# Altium PCB PDM-C_Rev3.PcbDoc
Units mil, origin at the board's own origin, x right, y up, seen from the top; angles counter-clockwise.
Board outline 5000 x 4200 mil, 2 copper layers (Top Layer, Bottom Layer); 84 components, 59 nets, 282 pads, 112 vias.
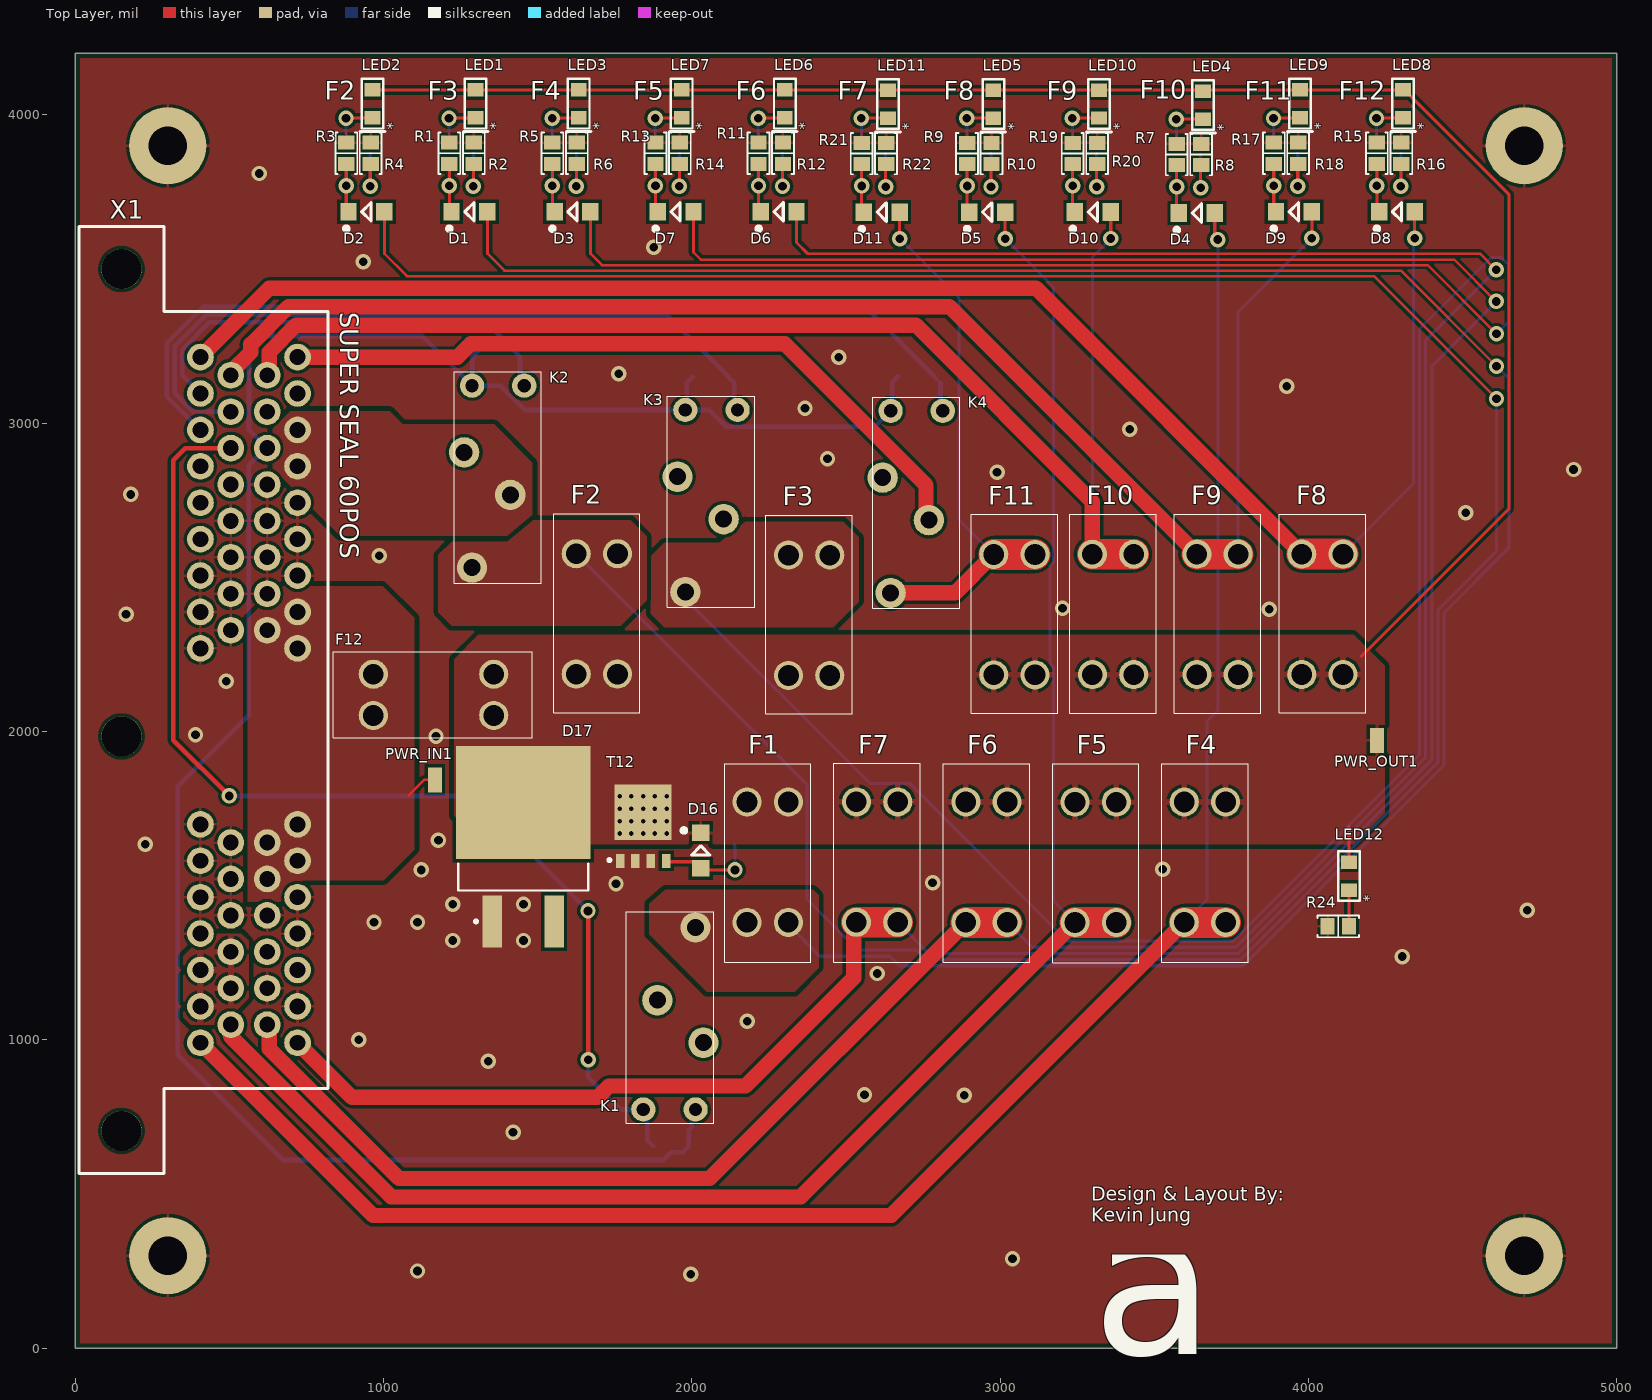
[diagram p0: Top Layer view]
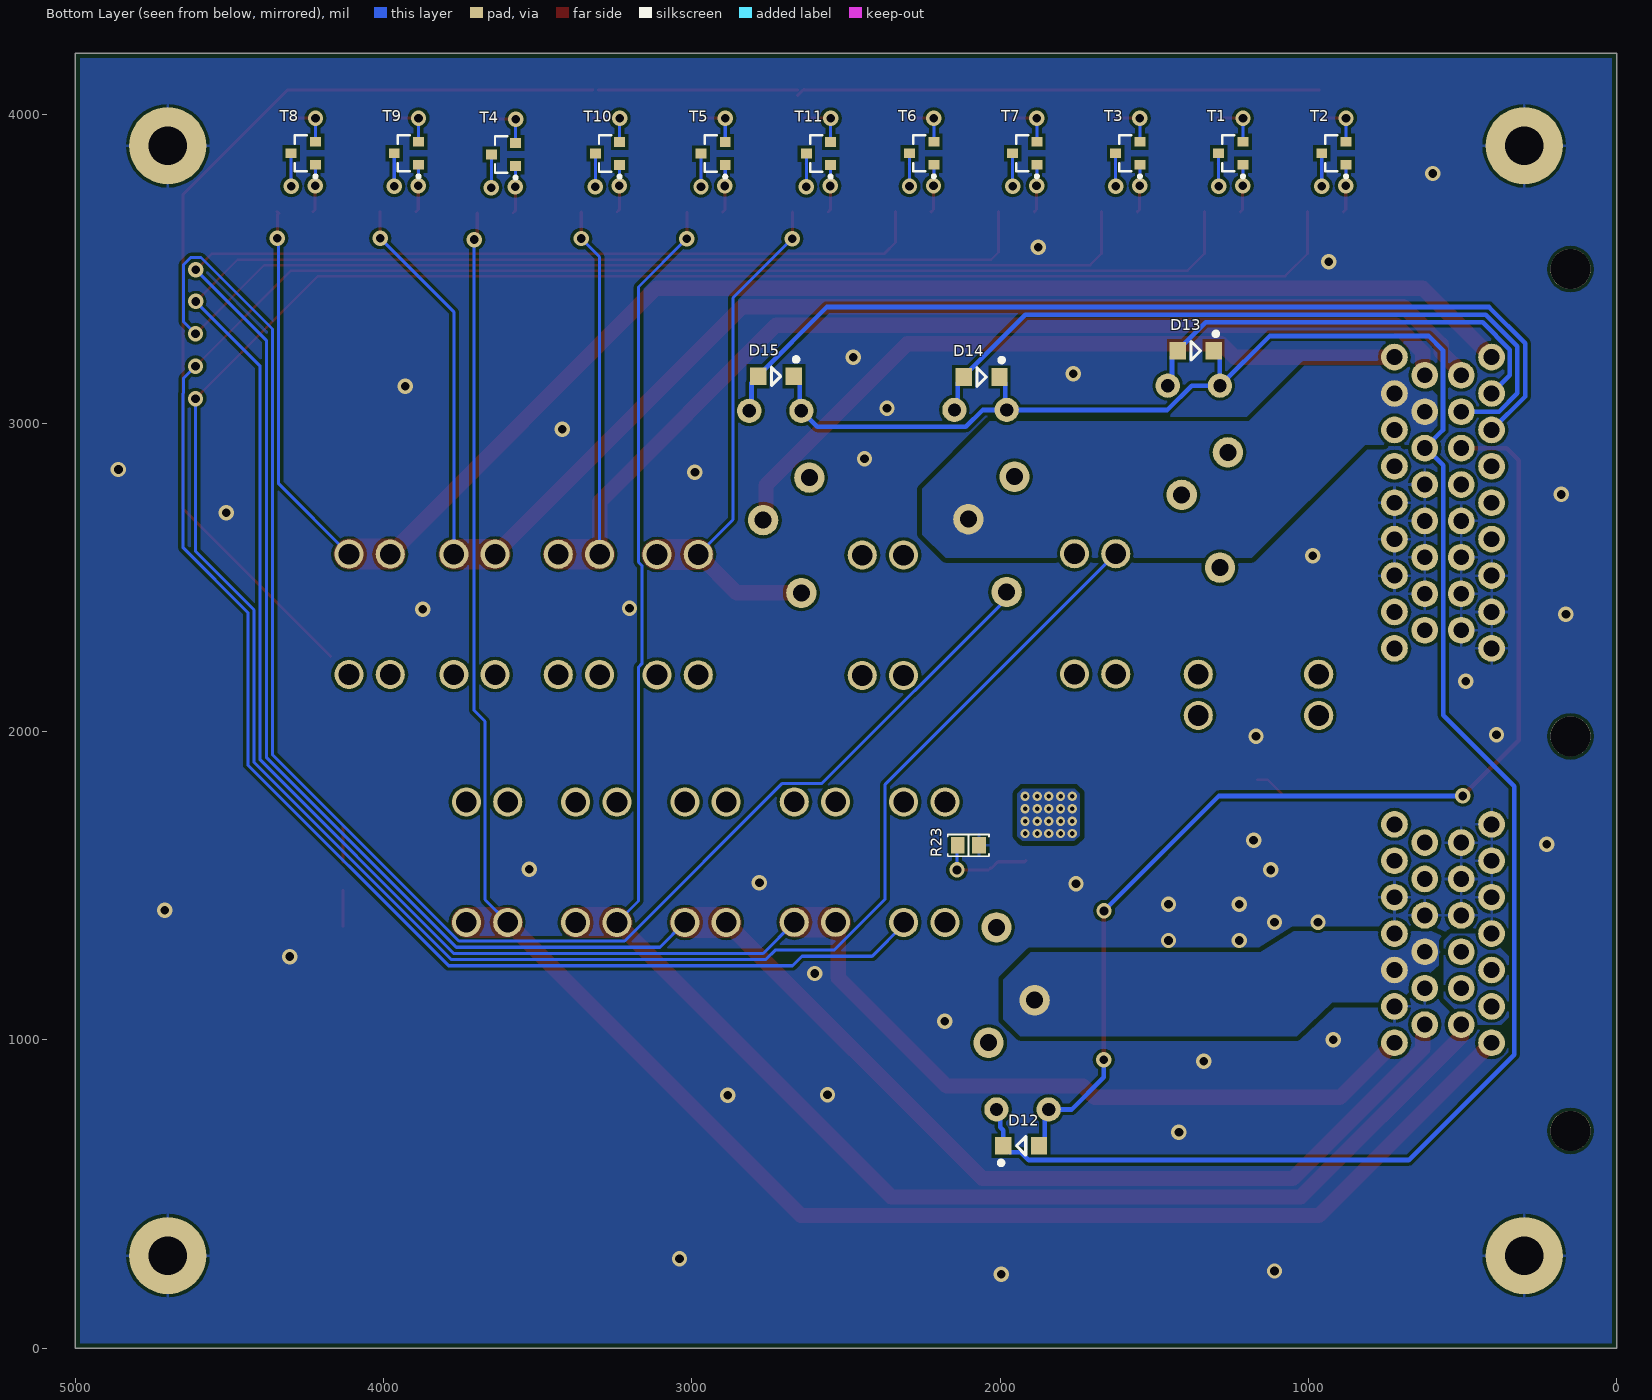
[diagram p1: Bottom Layer view, seen from below]
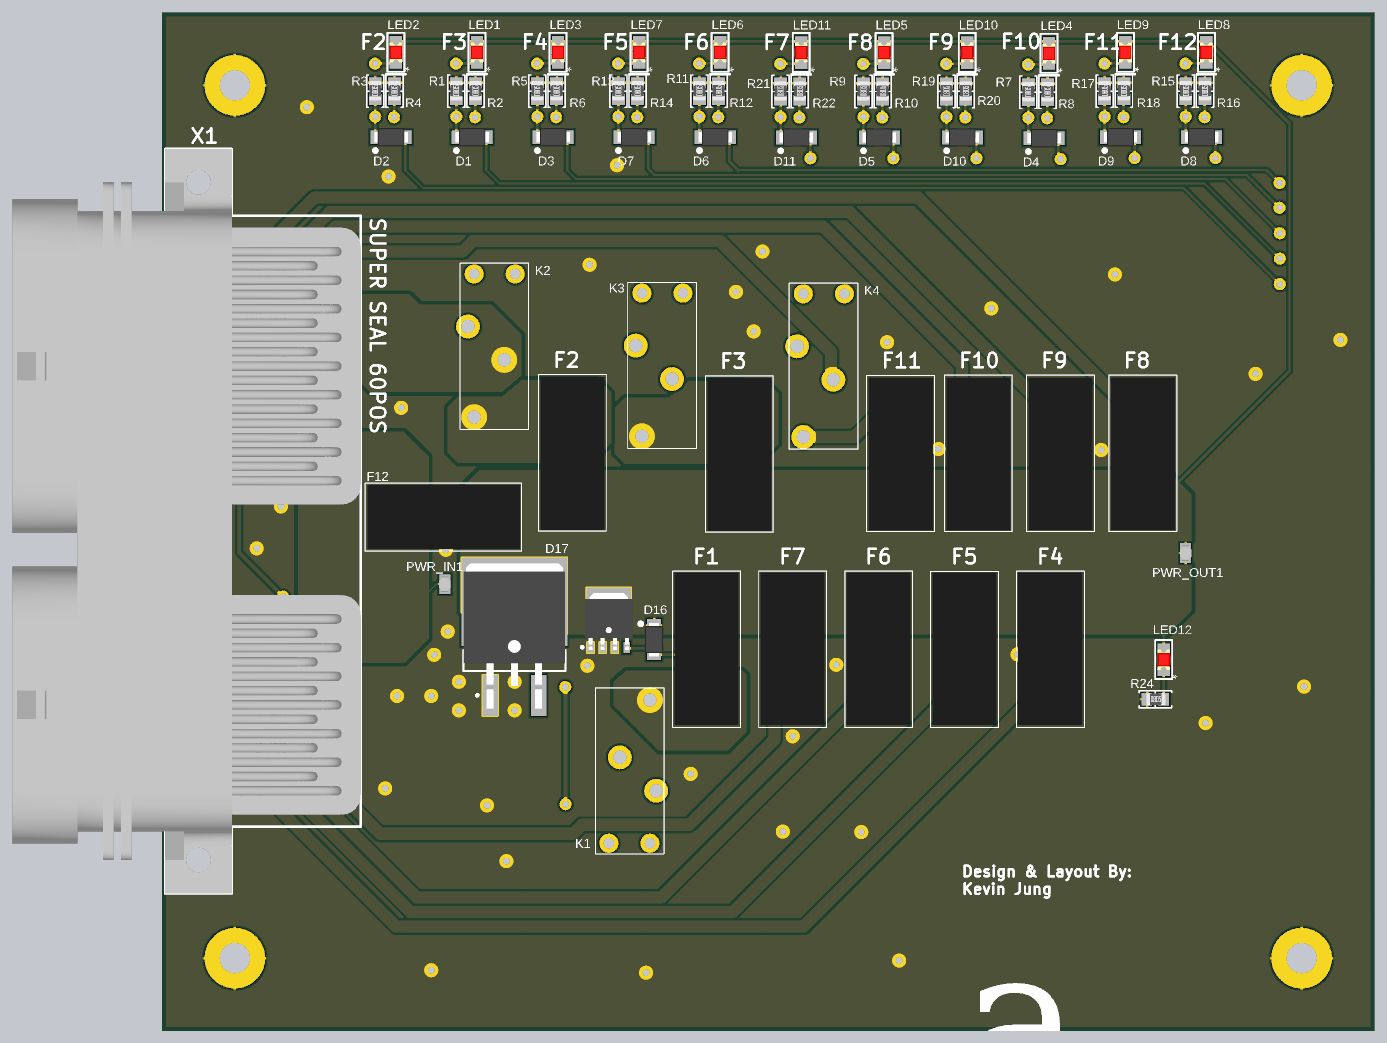
[diagram p2: 3D render of the assembled board from above, using the file's embedded part models]

## Layer stack, top to bottom
Top Solder: solder mask 0.4, Solder Resist, Dk 3.5
Top Layer: signal copper 1.4
Dielectric 1: dielectric 12.6, FR-4, Dk 4.8
Bottom Layer: signal copper 1.4
Bottom Solder: solder mask 0.4, Solder Resist, Dk 3.5

## Board outline
0,0 5000,0 5000,4200 0,4200

## Design rules (kind name [scope] priority, off if disabled: settings)
BoardOutlineClearance [All] p1: gap=15 ignorepadtopadclearanceinfootprint=FALSE
Clearance [All] p1: gap=10 ignorepadtopadclearanceinfootprint=FALSE except(0: Arc-Hole Track-Hole SMDPad-Hole THPad-Hole Via-Hole Fill-Hole Poly-Hole Region-Hole Text-Hole; 8: Track-THPad; 15: Poly-Poly)
Height [All] p1: minheight=0 maxheight=10000 prefheight=500
HoleSize [All] p1: absolutevalues=TRUE maxlimit=150 minlimit=10 maxpercent=80.000 minpercent=20.000
MinimumAnnularRing [All] p1: minimumring=7.5
MinimumSolderMaskSliver [All] p1: minsoldermaskwidth=8
PolygonConnect [All] p1: thpad.connectstyle=Relief thpad.reliefconductorwidth=10 thpad.reliefentries=4 thpad.polygonreliefangle="90 Angle" thpad.airgapwidth=10 smdpad.connectstyle=Relief smdpad.reliefconductorwidth=10 smdpad.reliefentries=4 smdpad.polygonreliefangle="90 Angle" smdpad.airgapwidth=10 via.connectstyle=Direct via.reliefconductorwidth=10 via.reliefentries=4 via.polygonreliefangle="90 Angle" via.airgapwidth=10
RoutingVias [All] p1: holewidth=28 width=50 viastyle="Through Hole" minholewidth=15 minwidth=30 maxholewidth=28 maxwidth=50
SolderMaskExpansion [All] p1: expansion=4
Width [All] p1: maxlimit=100 minlimit=8 preferedwidth=10 minimp=50.000000 maximp=50.000000 favimp=50.000000
27 further rules are at their usual default settings.

## Classes and differential pairs
channel class Relay: U_Relay1 U_Relay2 U_Relay3 U_Relay4
channel class Blown_Fuse_LED: U_Blown_Fuse_LED1 U_Blown_Fuse_LED2 U_Blown_Fuse_LED3 U_Blown_Fuse_LED4 U_Blown_Fuse_LED5 U_Blown_Fuse_LED6 U_Blown_Fuse_LED7 U_Blown_Fuse_LED8 U_Blown_Fuse_LED9 U_Blown_Fuse_LED10 U_Blown_Fuse_LED11
component class U_Superseal: X1
component class U_RVP_OVP_HC: D16 D17 LED12 PWR_IN1 PWR_OUT1 R23 R24 T12
component class U_Relay4: D15 J1_U_Relay4 J2_U_Relay4 J3_U_Relay4 J4_U_Relay4 K4 M1_U_Relay4
component class U_Relay3: D14 J1_U_Relay3 J2_U_Relay3 J3_U_Relay3 J4_U_Relay3 K3 M1_U_Relay3
component class U_Relay2: D13 J1_U_Relay2 J2_U_Relay2 J3_U_Relay2 J4_U_Relay2 K2 M1_U_Relay2
component class U_Relay1: D12 J1_U_Relay1 J2_U_Relay1 J3_U_Relay1 J4_U_Relay1 K1 M1_U_Relay1
component class U_Blown_Fuse_LED11: D11 F11 LED11 R21 R22 T11
component class U_Blown_Fuse_LED10: D10 F10 LED10 R19 R20 T10
component class U_Blown_Fuse_LED9: D9 F9 LED9 R17 R18 T9
component class U_Blown_Fuse_LED8: D8 F8 LED8 R15 R16 T8
component class U_Blown_Fuse_LED7: D7 F7 LED7 R13 R14 T7
component class U_Blown_Fuse_LED6: D6 F6 LED6 R11 R12 T6
component class U_Blown_Fuse_LED5: D5 F5 LED5 R9 R10 T5
component class U_Blown_Fuse_LED4: D4 F4 LED4 R7 R8 T4
component class U_Blown_Fuse_LED3: D3 F3 LED3 R5 R6 T3
component class U_Blown_Fuse_LED2: D2 F2 LED2 R3 R4 T2
component class U_Blown_Fuse_LED1: D1 F1 LED1 R1 R2 T1
component class PDM: F12

## Components (designator, comment, footprint, x,y, rotation, side; value= is the part's Value field where it differs from the comment)
D1 "1N5819" SOD123F 1278.58,3686 r180 top value=1A (schematic designator D2)
D2 "1N5819" SOD123F 944.29,3686 r180 top value=1A
D3 "1N5819" SOD123F 1612.87,3686 r180 top value=1A (schematic designator D2)
D4 "1N5819" SOD123F 3637.98,3681.83 r180 top value=1A (schematic designator D2)
D5 "1N5819" SOD123F 2957.98,3685 r180 top value=1A (schematic designator D2)
D6 "1N5819" SOD123F 2281.45,3686 r180 top value=1A (schematic designator D2)
D7 "1N5819" SOD123F 1947.16,3686 r180 top value=1A (schematic designator D2)
D8 "1N5819" SOD123F 4287.2,3686 r180 top value=1A (schematic designator D2)
D9 "1N5819" SOD123F 3952.91,3686 r180 top value=1A (schematic designator D2)
D10 "1N5819" SOD123F 3300.62,3685.17 r180 top value=1A (schematic designator D2)
D11 "1N5819" SOD123F 2615.98,3685 r180 top value=1A (schematic designator D2)
D12 "DIODE" SOD123F 1932,656 r0 bottom value=1A (schematic designator D1)
D13 "DIODE" SOD123F 1365.28,3235 r180 bottom value=1A (schematic designator D1)
D14 "DIODE" SOD123F 2060,3150 r180 bottom value=1A (schematic designator D1)
D15 "DIODE" SOD123F 2727,3152 r180 bottom value=1A (schematic designator D1)
D16 "DDZ9701-7" SOD123F 2029,1614 r90 top value=14Vz (schematic designator D3)
D17 "FFSB3065B-F085" FFSB3065B-F085 1453,1626 r90 top (schematic designator D4)
F1 "Fuse" 3568-MiniFuseHolder 2246,1576.18 r90 top (schematic designator F2)
F2 "Fuse" 3568-MiniFuseHolder 1691.77,2381.48 r270 top locked
F3 "Fuse" 3568-MiniFuseHolder 2380.42,2377 r270 top locked (schematic designator F2)
F4 "Fuse" 3568-MiniFuseHolder 3664.31,1576.17 r90 top locked (schematic designator F2)
F5 "Fuse" 3568-MiniFuseHolder 3309.96,1575.72 r90 top locked (schematic designator F2)
F6 "Fuse" 3568-MiniFuseHolder 2955.64,1576.17 r90 top locked (schematic designator F2)
F7 "Fuse" 3568-MiniFuseHolder 2600.77,1576.48 r90 top locked (schematic designator F2)
F8 "Fuse" 3568-MiniFuseHolder 4045.31,2380.17 r270 top locked (schematic designator F2)
F9 "Fuse" 3568-MiniFuseHolder 3705.18,2380 r270 top locked (schematic designator F2)
F10 "Fuse" 3568-MiniFuseHolder 3366.29,2379.72 r270 top locked (schematic designator F2)
F11 "Fuse" 3568-MiniFuseHolder 3046.09,2379 r270 top locked (schematic designator F2)
F12 "Fuse" 3568-MiniFuseHolder 1162,2119 r0 top (schematic designator F1)
K1 "ACTP112" ACTP112#1 1861.93,1364.55 r270 top locked
K2 "ACTP112" ACTP112#2 1437,2531.45 r90 top (schematic designator K1)
K3 "ACTP112" ACTP112#1 2129,2452.45 r90 top (schematic designator K1)
K4 "ACTP112" ACTP112#1 2794.66,2449.51 r90 top locked (schematic designator K1)
LED1 "Red LED 0805" 0805_LED 1298.58,4036 r270 top value=Red
LED2 "Red LED 0805" 0805_LED 964.29,4036 r270 top value=Red (schematic designator LED1)
LED3 "Red LED 0805" 0805_LED 1632.87,4036 r270 top value=Red (schematic designator LED1)
LED4 "Red LED 0805" 0805_LED 3657.98,4031.83 r270 top value=Red (schematic designator LED1)
LED5 "Red LED 0805" 0805_LED 2977.98,4035 r270 top value=Red (schematic designator LED1)
LED6 "Red LED 0805" 0805_LED 2301.45,4036 r270 top value=Red (schematic designator LED1)
LED7 "Red LED 0805" 0805_LED 1967.16,4036 r270 top value=Red (schematic designator LED1)
LED8 "Red LED 0805" 0805_LED 4307.2,4036 r270 top value=Red (schematic designator LED1)
LED9 "Red LED 0805" 0805_LED 3972.91,4036 r270 top value=Red (schematic designator LED1)
LED10 "Red LED 0805" 0805_LED 3320.62,4035.17 r270 top value=Red (schematic designator LED1)
LED11 "Red LED 0805" 0805_LED 2635.98,4035 r270 top value=Red (schematic designator LED1)
LED12 "LED" 0805_LED 4131.31,1530.8 r270 top value=Green (schematic designator LED2)
PWR_IN1 "RCU-0C" RCU-0C 1166.39,1843.08 r180 top
PWR_OUT1 "RCU-0C" RCU-0C 4221.92,1971 r180 top
R1 "Resistor 47k 0805 1/10W 1%" "RES 0805/2012" 1213.31,3875.72 r90 top value=47k
R2 "Resistor 470 0805 1/10W 1%" "RES 0805/2012" 1292.6,3875.73 r90 top value=470
R3 "Resistor 47k 0805 1/10W 1%" "RES 0805/2012" 879.02,3875.72 r90 top value=47k (schematic designator R1)
R4 "Resistor 470 0805 1/10W 1%" "RES 0805/2012" 958.31,3875.73 r90 top value=470 (schematic designator R2)
R5 "Resistor 47k 0805 1/10W 1%" "RES 0805/2012" 1547.6,3875.72 r90 top value=47k (schematic designator R1)
R6 "Resistor 470 0805 1/10W 1%" "RES 0805/2012" 1626.89,3875.73 r90 top value=470 (schematic designator R2)
R7 "Resistor 47k 0805 1/10W 1%" "RES 0805/2012" 3572.71,3871.55 r90 top value=47k (schematic designator R1)
R8 "Resistor 470 0805 1/10W 1%" "RES 0805/2012" 3652,3871.55 r90 top value=470 (schematic designator R2)
R9 "Resistor 47k 0805 1/10W 1%" "RES 0805/2012" 2892.71,3874.72 r90 top value=47k (schematic designator R1)
R10 "Resistor 470 0805 1/10W 1%" "RES 0805/2012" 2972,3874.72 r90 top value=470 (schematic designator R2)
R11 "Resistor 47k 0805 1/10W 1%" "RES 0805/2012" 2216.18,3875.72 r90 top value=47k (schematic designator R1)
R12 "Resistor 470 0805 1/10W 1%" "RES 0805/2012" 2295.47,3875.73 r90 top value=470 (schematic designator R2)
R13 "Resistor 47k 0805 1/10W 1%" "RES 0805/2012" 1881.89,3875.72 r90 top value=47k (schematic designator R1)
R14 "Resistor 470 0805 1/10W 1%" "RES 0805/2012" 1961.18,3875.73 r90 top value=470 (schematic designator R2)
R15 "Resistor 47k 0805 1/10W 1%" "RES 0805/2012" 4221.92,3875.72 r90 top value=47k (schematic designator R1)
R16 "Resistor 470 0805 1/10W 1%" "RES 0805/2012" 4301.21,3875.73 r90 top value=470 (schematic designator R2)
R17 "Resistor 47k 0805 1/10W 1%" "RES 0805/2012" 3887.63,3875.72 r90 top value=47k (schematic designator R1)
R18 "Resistor 470 0805 1/10W 1%" "RES 0805/2012" 3966.92,3875.73 r90 top value=470 (schematic designator R2)
R19 "Resistor 47k 0805 1/10W 1%" "RES 0805/2012" 3235.34,3874.9 r90 top value=47k (schematic designator R1)
R20 "Resistor 470 0805 1/10W 1%" "RES 0805/2012" 3314.63,3874.9 r90 top value=470 (schematic designator R2)
R21 "Resistor 47k 0805 1/10W 1%" "RES 0805/2012" 2550.71,3874.72 r90 top value=47k (schematic designator R1)
R22 "Resistor 470 0805 1/10W 1%" "RES 0805/2012" 2630,3874.72 r90 top value=470 (schematic designator R2)
R23 "Resistor 47k 0805 1/10W 1%" "RES 0805/2012" 2103.02,1631 r0 bottom value=47k (schematic designator R3)
R24 "Resistor 470 0805 1/10W 1%" "RES 0805/2012" 4096.86,1368 r0 top value=470 (schematic designator R4)
T1 "MMBT4403WT1G" SOT23-3 1251.69,3875.73 r0 bottom
T2 "MMBT4403WT1G" SOT23-3 917.4,3875.73 r0 bottom (schematic designator T1)
T3 "MMBT4403WT1G" SOT23-3 1585.98,3875.73 r0 bottom (schematic designator T1)
T4 "MMBT4403WT1G" SOT23-3 3611.09,3871.55 r0 bottom (schematic designator T1)
T5 "MMBT4403WT1G" SOT23-3 2931.09,3874.72 r0 bottom (schematic designator T1)
T6 "MMBT4403WT1G" SOT23-3 2254.56,3875.73 r0 bottom (schematic designator T1)
T7 "MMBT4403WT1G" SOT23-3 1920.27,3875.73 r0 bottom (schematic designator T1)
T8 "MMBT4403WT1G" SOT23-3 4260.31,3875.73 r0 bottom (schematic designator T1)
T9 "MMBT4403WT1G" SOT23-3 3926.02,3875.73 r0 bottom (schematic designator T1)
T10 "MMBT4403WT1G" SOT23-3 3273.73,3874.9 r0 bottom (schematic designator T1)
T11 "MMBT4403WT1G" SOT23-3 2589.09,3874.72 r0 bottom (schematic designator T1)
T12 "PSMN2R2-25YLC 25V Logic Level MOSFET" LFPAK-SO8 1842,1687.01 r90 top value=N_Channel (schematic designator T2)
X1 "3-6437285-2" "SUPERSEAL 60POS 90Deg" 150,3500 r270 top value=CONN

## Footprints (in the part's own frame and the unit in brackets; to place one, negate y for a bottom-side part, rotate by r counter-clockwise, add the part's x,y. Pads: shape width x height; smd on the part's side, far side on the other; paste and mask are expansions set on the pad)
0805_LED [mm]
  rect 1.1x1.3 smd: 1(-1.15,0) 2(1.15,0)
  silkscreen extent -2.06,-1.02 2.29,1.02, body extent -1.05,-0.67 1.05,0.68, height 0.9
3568-MiniFuseHolder [mm] "3568 Mini Fuse Holder"
  round 2.4 hole 1.7: 1(-4.96,-1.7) 1(-4.96,1.7) 2(4.96,-1.7) 2(4.96,1.7)
  silkscreen extent -8.25,-3.56 8.13,3.56, body extent -8,-4.19 8,3.38, height 16.17
ACTP112#1 [mm] "ACTP112, 12V Relay"
  round 2 hole 1.1: COIL1(15,3.81) COIL2(15,-0.49)
  round 2.5 hole 1.4: COM(0,3.81) NO(6,0.66)
  round 2.5 hole 1.4 unplated: NC(9.5,4.46)
  silkscreen extent -1.27,-1.91 16.13,5.3, body extent -1.27,-1.91 16.13,5.33, height 13.5
ACTP112#2 [mm] "ACTP112, 12V Relay"
  round 2 hole 1.1: COIL1(15,3.81) COIL2(15,-0.49)
  round 2.5 hole 1.4: COM(0,3.81) NC(9.5,4.46) NO(6,0.66)
  silkscreen extent -1.27,-1.91 16.13,5.3, body extent -1.27,-1.91 16.13,5.33, height 13.5
FFSB3065B-F085 [mil] "D2-PAK, 3-Pads, Body 7.93x8.70mm (max), IPC Medium Density"
  rect 169x62.99 smd: 1(-242,100) 2(-242,-100)
  rect 366x436 smd: 2(143.5,0)
  silkscreen extent -247,-211 -55,211, body extent -297,-210 303,210, height 190
LFPAK-SO8 [mm] "TO, 5-Pads, Body 5.15x5.86mm (max), IPC Low Density"
  rect 1.15x0.7 smd: 1(-2.7,1.905) 2(-2.7,0.635) 3(-2.7,-0.635) 4(-2.7,-1.905)
  rect 4.6x4.7 smd: mb(1.3,0)
  silkscreen extent -2.77,2.65 -2.53,2.9, body extent -2.95,-2.5 3.05,2.5, height 1.25
RCU-0C [mm]
  rect 1.15x2.05 smd: 1(0,0)
  body extent -0.6,-0.77 0.6,0.82, height 1.16
"RES 0805/2012" [mm] "Chip Resistor, 2-Leads, Body 2.00x1.25mm, IPC Medium Density"
  rect 1.15x1.35 smd: 1(-0.875,0) 2(0.875,0)
  silkscreen extent -1.7,-0.9 1.7,0.9, body extent -0.95,-0.62 1.05,0.63, height 0.6
SOD123F [mm] "SODFL, 2-Leads, Body 1.80x3.50mm, IPC Low Density"
  rect 1.35x1.45 smd: 1(-1.475,0) 2(1.475,0)
  silkscreen extent -0.38,-0.76 1.75,1.5, body extent -1.75,-0.95 1.75,0.95, height 1.15
SOT23-3 [mm] "SOT23, 3-Leads, Body 2.92x2.37mm, Pitch 0.95mm, IPC Medium Density, NUP2105L"
  rect 0.9x0.8 smd: 1(-1,0.95) 2(-1,-0.95) 3(1,0)
  silkscreen extent -1.12,-1.5 0.7,2.02, body extent -0.7,-1.52 0.7,1.52, height 1.11
"SUPERSEAL 60POS 90Deg" [mm]
  round 2.2 hole 1.3: A1(7.25,14.5) A2(10.25,14.5) A3(13.25,14.5) A4(16.25,14.5) A5(19.25,14.5) A6(22.25,14.5) A7(25.25,14.5) A8(28.25,14.5) A9(31.25,14.5) A10(8.75,12) A11(11.75,12) A12(14.75,12) A13(17.75,12) A14(20.75,12) A15(23.75,12) A16(26.75,12) A17(29.75,12) A18(8.75,9) A19(11.75,9) A20(14.75,9) A21(17.75,9) A22(20.75,9) A23(23.75,9) A24(26.75,9) A25(29.75,9) A26(7.25,6.5) A27(10.25,6.5) A28(13.25,6.5) A29(16.25,6.5) A30(19.25,6.5) A31(22.25,6.5) A32(25.25,6.5) A33(28.25,6.5) A34(31.25,6.5) B1(45.75,14.5) B2(48.75,14.5) B3(51.75,14.5) B4(54.75,14.5) B5(57.75,14.5) B6(60.75,14.5) B7(63.75,14.5) B8(47.25,12) B9(50.25,12) B10(53.25,12) B11(56.25,12) B12(59.25,12) B13(62.25,12) B14(47.25,9) B15(50.25,9) B16(53.25,9) B17(56.25,9) B18(59.25,9) B19(62.25,9) B20(45.75,6.5) B21(48.75,6.5) B22(51.75,6.5) B23(54.75,6.5) B24(57.75,6.5) B25(60.75,6.5) B26(63.75,6.5)
  round 3.3 hole 3.3 unplated: CH(38.5,0) LH(0,0) RH(71,0)
  silkscreen extent -3.5,-3.5 74.5,17, body extent -3.5,-19.5 74.5,17, height 28.15

## Part data
D1 D2 D3 D4 D5 D6 D7 D8 D9 D10 D11 D12 D13 D14 D15: library part 2, "Diode Super Barrier 40V 1A Surface Mount SOD-123F", Manufacturer_id=1, mfrpartno=1N5819HW1-7-F, package=SOD-123, Power=40V, Supplier1PartNo=1N5819HW1-7-FDITR-ND, ComponentLink1Description=Datasheet, ComponentLink1URL=https://www.diodes.com/assets/Datasheets/1N5819HW1.pdf, Drawer_id=1, Ic=1A, idDiode=2, link=https://www.digikey.com/product-detail/en/diodes-incorporated/1N5819HW1-7-F/1N5819HW1-7-FDITR-ND/5768523, name=1N5819, Num_Circuits=1, Supplier1=Digi-Key, Type="Super Barrier"
D16: library part 10, "Zener Diode 14V 500mW ±5% Surface Mount SOD-123", Manufacturer_id=8, package=SOD-123, Power=500mW, Supplier1PartNo=DDZ9701-7DICT-ND, ComponentLink1Description=Datasheet, ComponentLink1URL=https://www.diodes.com/assets/Datasheets/ds30410.pdf, Drawer_id=1, idDiode=10, link=https://www.digikey.com/product-detail/en/diodes-incorporated/DDZ9701-7/DDZ9701-7DICT-ND/3877402, mfrpartno=DDZ9701-7, name=DDZ9701, Num_Circuits=1, Supplier1=Digi-Key, Type=Zener
D17: library part 24, "Diode Silicon Carbide Schottky 650V 73A (DC)", package="D2PAK (TO-", createdby=Kevin, id=24, link=https://www.digikey.com/product-detail/en/on-semiconductor/FFSB3065B-F085/FFSB3065B-F085OSCT-ND/9764831, name=FFSB3065B-F085, numcircuits=1, quantity=0, vr=1.37999999523163
F1 F2 F3 F4 F5 F6 F7 F8 F9 F10 F11 F12: library part 3, Manufacturer_id=1, Drawer_id=1, idFuse=3, name="3568 Mini Fuse Holder"
K1 K2 K3 K4: library part 3, Coil_Voltage=12V, Manufacturer_id=1, Drawer_id=1, idRelay=3, LatestRevisionDate=17-Jul-2002, LatestRevisionNote="Re-released for DXP Platform.", name=ACTP112, PackageReference=MODULE5B, Published=8-Jun-2000, Publisher="Altium Limited"
LED1 LED2 LED3 LED4 LED5 LED6 LED7 LED8 LED9 LED10 LED11: library part 1, package=0805, Drawer_id=1, idLED=1, Manufacturer_id=1, name=LED_0805_RED, Vf=0.7V
LED12: library part 2, Manufacturer_id=1, package=0805, Brightness=7mcd, Drawer_id=1, id=20mA, idLED=2, link=https://www.digikey.com/product-detail/en/visual-communications-company-vcc/CMD17-21VGD-TR8/L62505CT-ND/254936, name=CMD17_0805_GREEN, Vf=2.1V
PWR_IN1 PWR_OUT1: library part 5, Manufacturer_id=1, package=0603, ComponentLink1Description=Datasheet, ComponentLink1URL=https://www.te.com/commerce/DocumentDelivery/DDEController?Action=srchrtrv&DocNm=1773266&DocType=DS&DocLang=English, Drawer_id=1, idTable=5, link=https://www.digikey.com/product-detail/en/te-connectivity-amp-connectors/RCU-0C/A106145CT-ND/3477802, mfrpartno=RCU-0C, name=RCU-0C_Test_Point
R1 R3 R5 R7 R9 R11 R13 R15 R17 R19 R21 R23: library part 545, Manufacturer_id=1, package=0805, Power=1/10W, Tolerance=1%, ComponentLink1Description=Datasheet, Created_By="Nick Mah", Created_Date=2018-10-20, Drawer_id=1, idResistor=545, name=Res_47k_0805_1/10W_1%, Supplier 1=Digi-Key
R2 R4 R6 R8 R10 R12 R14 R16 R18 R20 R22 R24: library part 497, Manufacturer_id=1, package=0805, Power=1/10W, Tolerance=1%, ComponentLink1Description=Datasheet, Created_By="Nick Mah", Created_Date=2018-10-20, Drawer_id=1, idResistor=497, name=Res_470_0805_1/10W_1%, Supplier 1=Digi-Key
T1 T2 T3 T4 T5 T6 T7 T8 T9 T10 T11: library part 3, Manufacturer_id=1, package=SOT23-3, Created_By=Angel, Drawer_id=1, Ic=600mA, idBJT=3, link=https://www.digikey.com/product-detail/en/on-semiconductor/MMBT4403WT1G/MMBT4403WT1GOSCT-ND/3487572, mfrpartno=MMBT4403WT1G, name=MMBT4403WT1G, Num_Circuits=1, Type=PNP, Vce(Max)=-40V
T12: library part 3, "N-Channel 25V 100A (Tc) 106W (Tc) Surface Mount LFPAK56, Power-SO8", Manufacturer_id=6, mfrpartno=PSMN2R2-25YLC,115, package=LFPAK-SO8, Supplier1PartNo=1727-5299-1-ND, ComponentLink1Description=Datasheet, ComponentLink1URL=https://assets.nexperia.com/documents/data-sheet/PSMN2R2-25YLC.pdf, Created_By=Nick, Drawer_id=1, id=100A, idFETs=3, link=https://www.digikey.com/product-detail/en/nexperia-usa-inc/PSMN2R2-25YLC115/1727-5299-1-ND/2674299, name=PSMN2R2, Num_Circuits=1, Rds_On=2.5mOhm, Supplier1=Digi-Key, Vdss=25V, Vgs(Max)=20V, Vgs(typ)=10V
X1: library part 3, "90 Degree", Manufacturer_id=1, ComponentLink1Description=Datasheet, Drawer_id=1, idConn=3, link=https://www.te.com/usa-en/product-3-6437285-2.html, mfrpartno=3-6437285-2, name="AMP Superseal 60POS 90Deg", Num_Contacts=60, Num_Rows=4, Pitch="3 mm"

## Free pads (board coordinates)
  round 250 hole 125: MH(300,300) MH(300,3900) MH(4700,300) MH(4700,3900)

## Via types
v1: diameter 50, hole 28, Top Layer to Bottom Layer, 92 vias
v2: diameter 30, hole 15, Top Layer to Bottom Layer, 20 vias

## Nets (pads, with @x,y where several pads share a name; then routed paths per layer and width w, separated by ;. In a path a pad name is that pad's centre, name@x,y a point inside that pad or via, vN(x,y) a via of type N, cw(c..) or ccw(c..) an arc to the next point about the centre after c; other vN are vias at no path point)
12V_IN: F12.1 PWR_IN1.1 X1.A8 X1.A9 X1.A17 X1.B1 X1.B2 X1.B8 X1.B9 | length 105.9
  Top Layer w8: 1081.17,1793.08 1131.17,1843.08 PWR_IN1.1
BSPD_12: D12.2 D13.2 D14.2 D15.2 K1.COIL1 K2.COIL1 K3.COIL1 K4.COIL1 X1.A12 | length 6981.9
  Bottom Layer w15: D13.2 1288.13,3215.93 1288.13,3123.13 K2.COIL1 ; D14.2 1982.85,3130.93 1982.85,3046.85 K3.COIL1 ; K1.COIL1 1999.73,761.8 1999.73,716.71 1990.07,707.04 D12.2 1990.07,654.03 1971,634.96 1932.75,634.96 1907.75,609.96 674.04,609.96 332,952 332,1822 563.14,2053.14 563.14,2863.14 619.29,2919.29 X1.A12 563.63,2978.1 563.63,3236.63 610,3283 1126,3283 K2.COIL1 ; D15.2 2649.85,3132.93 2649.85,3045.26 K4.COIL1 2592.72,2988.13 2111.07,2988.13 2056.2,3043 K3.COIL1 ; K2.COIL1 1378.69,3122 1457.69,3043 K3.COIL1
"Fused 12V": D16.2 D17.2 F1.2 F2.2 F3.2 F4.2 F5.2 F6.2 F7.2 F8.2 F9.2 F10.2 F11.2 F12.2 LED1.1 LED2.1 LED3.1 LED4.1 LED5.1 LED6.1 LED7.1 LED8.1 LED9.1 LED10.1 LED11.1 LED12.1 PWR_OUT1.1 T12.mb | length 5631.6
  Top Layer w10: LED2.1 2632.98,4081.28 LED11.1@2635.98,4084.27 ; LED11.1 2639.92,4080.27 LED11.1@2656.57,4063.62 ; LED11.1@2655.26,4081.28 3010.98,4081.28 LED10.1@3304.32,4081.28 ; LED10.1 3321.44,4081.28 3667.98,4081.28 LED9.1 4311.13,4081.28 4650,3742.41 4650,2721.85 4171.57,2243.43 ; LED12.1 4131.31,1690.98
  other v2: 1766,1669 1804,1669 1842,1669 1880,1669 1919,1669 1766,1709.25 1804,1709.25 1842,1709.25 1880,1709.25 1919,1709.25 1766,1749.5 1804,1749.5 1842,1749.5 1880,1749.5 1919,1749.5 1766,1789.75 1804,1789.75 1842,1789.75 1880,1789.75 1919,1789.75
GND: D17.1 pad.MH R1.2 R2.2 R3.2 R4.2 R5.2 R6.2 R7.2 R8.2 R9.2 R10.2 R11.2 R12.2 R13.2 R14.2 R15.2 R16.2 R17.2 R18.2 R19.2 R20.2 R21.2 R22.2 R23.1 R24.1 T12.1 T12.2 T12.3 X1.A5 X1.A6 X1.A7 X1.A13 X1.A14 X1.A15 X1.A16 X1.A22 X1.A23 X1.A24 X1.A25 X1.A32 X1.A33 X1.A34 X1.B3 X1.B4 X1.B6 X1.B10 X1.B12 X1.B14 X1.B15 X1.B16 X1.B20 X1.B21 X1.B22 X1.B23
  other v1: 1995.97,240 1110,250 3040,290 1420,700 2883.78,820 2560,822 1340,930 920,1000 2180,1060 2601,1215 4304,1270 1224,1322 1454,1322 969,1381.21 1110,1381.21 4710,1420 1224,1440 1454,1440 1754,1506 2780.73,1510 1122,1551 3528,1553 227,1634.28 1178,1647 1170,1984.25 390,1990 490,2162.95 164.69,2380 3873,2396 3202.2,2400 986,2570 4510,2710 180,2769.01 2990,2840.46 4860,2850 2440,2884.82 3420,2980 2367,3048 3930,3120 1763,3160 2476.22,3214.57 934,3524 1876.29,3570.44 597,3810
HC1_TO_RELAY: D3.1 F3.1 K3.COM | length 8311.6
  Top Layer w8: 1670.94,3550 1707.94,3513 4387,3513 v1(4610,3290)
  Top Layer w10: 1670.94,3550 D3.1
  Bottom Layer w10: K3.COM 1979,2431.02 2578.01,1832 2706.28,1832 3218.07,1320.2 3755.74,1320.2 4360.27,1924.73 4360.27,3305.42 4592.43,3537.59 4625.57,3537.59 4649,3514.15 4649,3329 v1(4610,3290)
HC2_TO_RELAY: D1.1 F1.1 K1.COM | length 7409
  Top Layer w8: 1336.65,3550 1391.65,3495 4300,3495 v1(4610,3185)
  Top Layer w10: 1336.65,3550 D1.1
  Bottom Layer w10: F1.1@2313.31,1372.7 2415.02,1271 2643,1271 2673.8,1240.2 3788.88,1240.2 4440.27,1891.59 4440.27,2386.33 4650,2596.06 4650,3096.57 4649,3097.57 4649,3146 v1(4610,3185)
HC3_TO_RELAY: D2.1 F2.1 K2.COM | length 9020.5
  Top Layer w8: 1002.36,3550 1075.36,3477 4213,3477 v1(4610,3080)
  Top Layer w10: 1002.36,3550 D2.1
  Bottom Layer w10: F2.1@1624.84,2576.76 2373.17,1828.43 2373.17,1456.68 2538.85,1291 2729.62,1291 2760.42,1260.2 3780.59,1260.2 4420.27,1899.88 4420.27,2394.61 4610,2584.34 v1(4610,3080)
HC_1: K3.NO X1.A2 X1.A11
HC_2: K1.NO X1.B5 X1.B11
HC_3: K2.NO X1.A3 X1.A4
LC_1: D10.1 F10.1 X1.A10 | length 4459.9
  Top Layer w10: v1(3358.69,3599.17) D10.1
  Top Layer w50: X1.A10 629.45,3162.52 629.45,3231.06 716.38,3318 2726.4,3318 3299.36,2745.04 F10.1@3299.36,2575 ; F10.1@3432.2,2575 F10.1@3432.93,2574.28
  Top Layer w100: F10.1@3299.8,2575 F10.1@3432.2,2575
  Bottom Layer w10: F10.1@3299.36,2575 3299.36,3539.85 v1(3358.69,3599.17)
LC_2: D9.1 F9.1 X1.A18 | length 4922.8
  Top Layer w10: v1(4010.98,3600) D9.1
  Top Layer w50: X1.A18 504.33,3165.42 569.45,3230.54 569.45,3255.91 691.53,3378 2835.52,3378 F9.1@3638.25,2575.28
  Top Layer w100: F9.1@3638.25,2575.28 F9.1@3772.1,2575.28
  Bottom Layer w10: F9.1@3772.1,2575.28 3772.1,3361.13 v1(4010.98,3600)
LC_3: D8.1 F8.1 X1.A26 | length 5366.7
  Top Layer w10: v1(4344.46,3600) 4344.46,3676.28 4340,3680.73 D8.1
  Top Layer w50: X1.A26 629.34,3438 3115.83,3438 F8.1@3978.38,2575.45 ; F8.1@4111.76,2575.45 F8.1@4111.93,2575.28
  Top Layer w100: F8.1@3978.38,2575.45 F8.1@4111.76,2575.45
  Bottom Layer w10: F8.1@4112.24,2575.45 4340.27,2803.48 4340.27,3595.81 v1(4344.46,3600)
LC_4: D7.1 F7.1 X1.B7 | length 8764.2
  Top Layer w8: 2005.23,3554.77 2029,3531 4473,3531 v1(4609,3395)
  Top Layer w10: 2005.23,3554.77 D7.1
  Top Layer w50: X1.B7 898.02,813 1693.85,813 1730.85,850 2173.9,850 2525.33,1201.43 2525.33,1371.98 F7.1@2534.55,1381.21
  Top Layer w100: F7.1@2534.55,1381.21 F7.1@2667.45,1381.21
  Bottom Layer w10: F7.1@2667.7,1381.21 2768.7,1280.2 3772.31,1280.2 4400.27,1908.16 4400.27,3185.27 4609,3394 v1(4609,3395)
LC_5: D6.1 F6.1 X1.B13 | length 8720.8
  Top Layer w8: 2376,3550 4556.59,3550 v1(4609,3497.59)
  Top Layer w10: D6.1 2339.52,3586.48 2376,3550
  Top Layer w50: X1.B13 629.45,1042.21 629.45,970.83 1050.28,550 2057.81,550 2888.4,1380.59 2888.4,1380.72 2888.58,1380.9 F6.1@2888.71,1380.9 ; F6.1@3022.09,1380.9 F6.1@3022.26,1380.72
  Top Layer w100: F6.1@2888.71,1380.9 F6.1@3022.09,1380.9
  Bottom Layer w10: F6.1@3022.57,1380.9 3103.26,1300.2 3764.03,1300.2 4380.27,1916.45 4380.27,3268.85 v1(4609,3497.59)
LC_6: D5.1 F5.1 X1.B19 | length 5903.5
  Top Layer w10: v1(3016.05,3599) D5.1
  Top Layer w50: X1.B19 504.33,1011.1 1025.43,490 2352.58,490 3242.74,1380.16 3242.74,1380.72 F5.1@3243.01,1380.45 ; F5.1@3376.32,1380.45 F5.1@3376.6,1380.72
  Top Layer w100: F5.1@3243.03,1380.45 F5.1@3376.32,1380.45
  Bottom Layer w10: v1(3016.05,3599) 3173.27,3441.79 3173.27,2549.32 3162.2,2538.26 3162.2,2219.74 3173.27,2208.68 3173.27,1450.21 F5.1@3243.03,1380.45
LC_7: D4.1 F4.1 X1.B26 | length 6297
  Top Layer w10: v1@3696.05,3595.83 D4.1
  Top Layer w50: X1.B26 966.06,430 2646.48,430 3597.07,1380.59 3597.07,1380.72 3597.24,1380.9 F4.1@3597.38,1380.9 ; F4.1@3730.76,1380.9 F4.1@3730.93,1380.72
  Top Layer w100: F4.1@3597.38,1380.9 F4.1@3730.76,1380.9
  Bottom Layer w10: F4.1@3597.38,1380.9 3670.99,1454.51 3670.99,2032.99 3706.05,2068.05 v1(3706.05,3595.83)
LC_8: K4.NO X1.A1 | length 2364
  Top Layer w8: K4.NO@2759.41,2695 K4.NO
  Top Layer w50: X1.A1 1239.88,3214.57 1283.31,3258 2300.86,3258 2759.41,2799.45 K4.NO@2759.41,2695
LC_TO_RELAY: D11.1 F11.1 K4.COM | length 1757.1
  Top Layer w10: v1(2674.05,3599) D11.1
  Top Layer w50: K4.COM 2854.31,2449.51 2979.07,2574.28 F11.1@2979.16,2574.28
  Top Layer w100: F11.1@2979.16,2574.28 F11.1@3112.93,2574.28
  Bottom Layer w10: v1(2674.05,3599) 2866.32,3406.74 2866.32,2687.12 F11.1@2979.16,2574.28
LED_IND_U_Blown_Fuse_LED1: LED1.2 T1.2 | length 163.3
  Top Layer w10: v1(1212.32,3989.74) 1213.31,3990.72 LED1.2
  Bottom Layer w10: T1.2 v1(1212.32,3989.74)
LED_IND_U_Blown_Fuse_LED2: LED2.2 T2.2 | length 163.3
  Top Layer w10: v1(878.03,3989.74) 879.02,3990.72 LED2.2
  Bottom Layer w10: T2.2 v1(878.03,3989.74)
LED_IND_U_Blown_Fuse_LED3: LED3.2 T3.2 | length 163.3
  Top Layer w10: v1(1546.61,3989.74) 1547.6,3990.72 LED3.2
  Bottom Layer w10: T3.2 v1(1546.61,3989.74)
LED_IND_U_Blown_Fuse_LED4: LED4.2 T4.2 | length 163.3
  Top Layer w10: v1(3571.72,3985.57) 3572.71,3986.55 LED4.2
  Bottom Layer w10: T4.2 v1(3571.72,3985.57)
LED_IND_U_Blown_Fuse_LED5: LED5.2 T5.2 | length 163.3
  Top Layer w10: v1(2891.72,3988.74) 2892.71,3989.72 LED5.2
  Bottom Layer w10: T5.2 v1(2891.72,3988.74)
LED_IND_U_Blown_Fuse_LED6: LED6.2 T6.2 | length 163.3
  Top Layer w10: v1(2215.19,3989.74) 2216.18,3990.72 LED6.2
  Bottom Layer w10: T6.2 v1(2215.19,3989.74)
LED_IND_U_Blown_Fuse_LED7: LED7.2 T7.2 | length 163.3
  Top Layer w10: v1(1880.9,3989.74) 1881.89,3990.72 LED7.2
  Bottom Layer w10: T7.2 v1(1880.9,3989.74)
LED_IND_U_Blown_Fuse_LED8: LED8.2 T8.2 | length 163.3
  Top Layer w10: v1(4220.94,3989.74) 4221.92,3990.72 LED8.2
  Bottom Layer w10: T8.2 v1(4220.94,3989.74)
LED_IND_U_Blown_Fuse_LED9: LED9.2 T9.2 | length 163.3
  Top Layer w10: v1(3886.65,3989.74) 3887.63,3990.72 LED9.2
  Bottom Layer w10: T9.2 v1(3886.65,3989.74)
LED_IND_U_Blown_Fuse_LED10: LED10.2 T10.2 | length 163.3
  Top Layer w10: v1(3234.36,3988.91) 3235.34,3989.9 LED10.2
  Bottom Layer w10: T10.2 v1(3234.36,3988.91)
LED_IND_U_Blown_Fuse_LED11: LED11.2 T11.2 | length 163.3
  Top Layer w10: v1(2549.72,3988.74) 2550.71,3989.72 LED11.2
  Bottom Layer w10: T11.2 v1(2549.72,3988.74)
NetD1_2: D1.2 R1.1 T1.1 | length 226.3
  Top Layer w10: R1.1 v1(1213.31,3770.73) 1213.31,3693.2 D1.2
  Bottom Layer w10: T1.1 1212.32,3771.71 v1(1213.31,3770.73)
NetD2_2: D2.2 R3.1 T2.1 | length 226.3
  Top Layer w10: R3.1 v1(879.02,3770.73) 879.02,3693.2 D2.2
  Bottom Layer w10: T2.1 878.03,3771.71 v1(879.02,3770.73)
NetD3_2: D3.2 R5.1 T3.1 | length 226.3
  Top Layer w10: R5.1 v1(1547.6,3770.73) 1547.6,3693.2 D3.2
  Bottom Layer w10: T3.1 1546.61,3771.71 v1(1547.6,3770.73)
NetD4_2: D4.2 R7.1 T4.1 | length 226.3
  Top Layer w10: R7.1 v1(3572.71,3766.55) 3572.71,3689.03 D4.2
  Bottom Layer w10: T4.1 3571.72,3767.54 v1(3572.71,3766.55)
NetD5_2: D5.2 R9.1 T5.1 | length 226.3
  Top Layer w10: R9.1 v1(2892.71,3769.72) 2892.71,3692.2 D5.2
  Bottom Layer w10: T5.1 2891.72,3770.71 v1(2892.71,3769.72)
NetD6_2: D6.2 R11.1 T6.1 | length 226.3
  Top Layer w10: R11.1 v1(2216.18,3770.73) 2216.18,3693.2 D6.2
  Bottom Layer w10: T6.1 2215.19,3771.71 v1(2216.18,3770.73)
NetD7_2: D7.2 R13.1 T7.1 | length 226.3
  Top Layer w10: R13.1 v1(1881.89,3770.73) 1881.89,3693.2 D7.2
  Bottom Layer w10: T7.1 1880.9,3771.71 v1(1881.89,3770.73)
NetD8_2: D8.2 R15.1 T8.1 | length 226.3
  Top Layer w10: R15.1 v1(4221.92,3770.73) 4221.92,3693.2 D8.2
  Bottom Layer w10: T8.1 4220.94,3771.71 v1(4221.92,3770.73)
NetD9_2: D9.2 R17.1 T9.1 | length 226.3
  Top Layer w10: R17.1 v1(3887.63,3770.73) 3887.63,3693.2 D9.2
  Bottom Layer w10: T9.1 3886.65,3771.71 v1(3887.63,3770.73)
NetD10_2: D10.2 R19.1 T10.1 | length 226.3
  Top Layer w10: R19.1 v1(3235.34,3769.9) 3235.34,3692.38 D10.2
  Bottom Layer w10: T10.1 3234.36,3770.88 v1(3235.34,3769.9)
NetD11_2: D11.2 R21.1 T11.1 | length 226.3
  Top Layer w10: R21.1 v1(2550.71,3769.72) 2550.71,3692.2 D11.2
  Bottom Layer w10: T11.1 2549.72,3770.71 v1(2550.71,3769.72)
NetD16_1: D16.1 R23.2 T12.4 | length 318
  Top Layer w10: T12.4 1920.2,1577.5 2007.43,1577.5 D16.1 2031,1557.93 2037.93,1551 v1(2140,1551)
  Bottom Layer w10: R23.2 2140,1628.46 v1(2140,1551)
NetLED12_2: LED12.2 R24.2 | length 117.5
  Top Layer w10: R24.2 LED12.2
NetR2_1: R2.1 T1.3 | length 180.7
  Top Layer w10: v1(1291.06,3768.48) 1291.06,3839.74 R2.1
  Bottom Layer w10: v1(1291.06,3768.48) T1.3
NetR4_1: R4.1 T2.3 | length 180.7
  Top Layer w10: v1(956.77,3768.48) 956.77,3839.74 R4.1
  Bottom Layer w10: v1(956.77,3768.48) T2.3
NetR6_1: R6.1 T3.3 | length 180.7
  Top Layer w10: v1(1625.35,3768.48) 1625.35,3839.74 R6.1
  Bottom Layer w10: v1(1625.35,3768.48) T3.3
NetR8_1: R8.1 T4.3 | length 180.7
  Top Layer w10: v1(3650.46,3764.31) 3650.46,3835.57 R8.1
  Bottom Layer w10: v1(3650.46,3764.31) T4.3
NetR10_1: R10.1 T5.3 | length 180.7
  Top Layer w10: v1(2970.46,3767.48) 2970.46,3838.74 R10.1
  Bottom Layer w10: v1(2970.46,3767.48) T5.3
NetR12_1: R12.1 T6.3 | length 180.7
  Top Layer w10: v1(2293.93,3768.48) 2293.93,3839.74 R12.1
  Bottom Layer w10: v1(2293.93,3768.48) T6.3
NetR14_1: R14.1 T7.3 | length 180.7
  Top Layer w10: v1(1959.64,3768.48) 1959.64,3839.74 R14.1
  Bottom Layer w10: v1(1959.64,3768.48) T7.3
NetR16_1: R16.1 T8.3 | length 180.7
  Top Layer w10: v1(4299.68,3768.48) 4299.68,3839.74 R16.1
  Bottom Layer w10: v1(4299.68,3768.48) T8.3
NetR18_1: R18.1 T9.3 | length 180.7
  Top Layer w10: v1(3965.39,3768.48) 3965.39,3839.74 R18.1
  Bottom Layer w10: v1(3965.39,3768.48) T9.3
NetR20_1: R20.1 T10.3 | length 180.7
  Top Layer w10: v1(3313.1,3767.65) 3313.1,3838.91 R20.1
  Bottom Layer w10: v1(3313.1,3767.65) T10.3
NetR22_1: R22.1 T11.3 | length 180.7
  Top Layer w10: v1(2628.46,3767.48) 2628.46,3838.74 R22.1
  Bottom Layer w10: v1(2628.46,3767.48) T11.3
Rectifier: X1.B17 X1.B18 X1.B24 X1.B25
Relay_Sig_HC_1: D14.1 K3.COIL2 X1.A19 | length 2402
  Bottom Layer w15: X1.A19 381.79,3037.4 322.1,3097.1 322.1,3249.28 424.82,3352 1918.04,3352 2118.07,3151.97 D14.1 2137.15,3130.93 2137.15,3054.15 K3.COIL2
Relay_Sig_HC_2: D12.1 K1.COIL2 X1.A20 | length 3578.2
  Top Layer w15: v1(499,1791) 318,1972 318,2880 357.29,2919.29 X1.A20 ; v1(1663,1418) 1663.5,1417.5 1663.5,935.5 v1(1664,935)
  Bottom Layer w15: v1(499,1791) 1290,1791 v1(1663,1418) ; v1(1664,935) 1664,878 1768,774 K1.COIL2 1842.64,756.75 1854.85,744.54 1854.85,675.07 D12.1
Relay_Sig_HC_3: D13.1 K2.COIL2 X1.A27 | length 1445.5
  Bottom Layer w15: X1.A27 347.1,3155.26 347.1,3238.93 435.17,3327 1333.32,3327 1423.35,3236.97 D13.1 1442.42,3215.93 1442.42,3153.12 1456.29,3139.25 K2.COIL2
Relay_Sig_LC: D15.1 K4.COIL2 X1.A28 | length 3081.4
  Bottom Layer w10: D15.1 D15.1@2806.65,3130.43 ; K4.COIL2@2806.65,3047.36 K4.COIL2
  Bottom Layer w15: X1.A28 405.49,2978.35 297.1,3086.74 297.1,3259.64 414.46,3377 2562.04,3377 2785.07,3153.97 D15.1 ; K4.COIL2@2806.65,3047.36 D15.1@2806.65,3130.43
pads on no net: K1.NC K2.NC K3.NC K4.NC X1.A21 X1.A29 X1.A30 X1.A31 X1.CH X1.LH X1.RH

## Polygon pours and split planes (outlines as drawn)
Rectifier on Top Layer "Bottom Layer-Rectifier" (solid, pour order 53): 349.69,1270.69 423.39,1344.39 538.41,1344.39 562,1320.8 562,1135 476.21,1049.21 374.13,1049.21 349.86,1073.48
GND on Top Layer "GND_TOP" (solid, pour order 64): 0,0 5000,0 5000,4200 0,4200
"Fused 12V" on Top Layer "Top Layer-12 V_U_Blown_Fuse_LED1" (solid, pour order 58): 1228.78,2234.78 1228.78,1726.22 1320.72,1634.28 4146.28,1634.28 4246.78,1734.78 4246.78,2213.22 4146.72,2313.28 1307.28,2313.28
HC1_TO_RELAY on Top Layer "Top Layer-HC1_TO_RELAY" (solid, pour order 61): 2172.65,2680.52 2173.38,2681.25 2490.65,2680.52 2541.65,2629.52 2541.65,2421.52 2458.65,2338.52 1909.65,2338.52 1866.49,2381.67 1866.49,2568.31 1909.7,2611.52 2089.34,2611.52
HC3_TO_RELAY on Top Layer "Top Layer-HC2_TO_RELAY" (solid, pour order 60): 1484,2685 1484,2685.73 1802,2685 1853,2634 1853,2426 1770,2343 1221,2343 1177.85,2386.15 1177.85,2572.79 1221.05,2616 1400.7,2616
12V_IN on Top Layer "Top Layer-12V_IN" (solid, pour order 57): 581,2387 666,2472 997,2472 1100,2369 1100,1617 1001,1518 739,1518 668,1447 560,1447 560,2366
HC_3 on Top Layer "HC_2_L01_P055" (solid, pour order 55): 1401,2635 1483,2703.33 1483,2872 1359,2996 1063,2996 1020,3039 697,3039 640,2982 640,2854 859,2635
HC2_TO_RELAY on Top Layer "HC2_TO_RELAY_L01_P052" (solid, pour order 54): 1862,1441 1862,1343 2049,1156 2333,1156 2411,1234 2411,1469 2394,1486 1914,1486
no net on Bottom Layer "Bottom Layer-Rectifier" (solid, pour order 52): 349.38,1270.69 423.08,1344.39 538.1,1344.39 561.69,1320.8 561.69,1135 475.9,1049.21 373.82,1049.21 349.55,1073.48
GND on Bottom Layer "GND_BOTTOM" (solid, pour order 63): 0,0 5000,0 5000,4200 0,4200
"Fused 12V" on Bottom Layer "Bottom Layer-No Net" (solid, pour order 62): 1742,1662 1742,1798 1758,1814 1928,1814 1944,1798 1944,1660.59 1928.41,1645 1759,1645
HC_2 on Bottom Layer "HC_3_L02_P056" (solid, pour order 56): 562,1336.1 562,1256.01 710.11,1121 923.04,1121 1038.6,1012 1935.41,1012 1990,1066.59 1990,1195 1901,1284 1156,1284 1047.2,1352 599.71,1352
HC_1 on Bottom Layer "Bottom Layer-HC_1" (solid, pour order 59): 566.5,3075.5 678,3187 1013,3187 1193.5,3006.5 2033.5,3006.5 2253,2787 2253,2639 2177,2563 1184,2563 816,2931 642,2931 566.5,3006.5
"Fused 12V" on Bottom Solder "Bottom Layer-No Net" (solid, pour order 65): 1742,1662 1742,1798 1758,1814 1928,1814 1944,1798 1944,1660.59 1928.41,1645 1759,1645

## Silkscreen, mask and mechanical layers (free items; w line width, h text height)
Top Overlay:
  text "F10" at 3453,4053 h60
  text "F2" at 810,4050 h60
  text "F3" at 1143.09,4050 h60
  text "F4" at 1476.17,4050 h60
  text "F5" at 1809.26,4050 h60
  text "F6" at 2142.34,4050 h60
  text "F9" at 3151,4050 h60
  text "F11" at 3793,4050 h60
  text "F12" at 4098,4050 h60
  text "F7" at 2473.26,4049 h60
  text "F8" at 2817.67,4049 h60
  text "Design & Layout By: / Kevin Jung" at 3295,410 h45
  text "a" at 3299.15,-243.7 h1181.1

## Text inside footprints (layer, text, board x,y; h text height)
LED1: Top Overlay "*" at 1318.58,3976 h60 r270
LED2: Top Overlay "*" at 984.29,3976 h60 r270
LED3: Top Overlay "*" at 1652.87,3976 h60 r270
LED4: Top Overlay "*" at 3677.98,3971.83 h60 r270
LED5: Top Overlay "*" at 2997.98,3975 h60 r270
LED6: Top Overlay "*" at 2321.45,3976 h60 r270
LED7: Top Overlay "*" at 1987.16,3976 h60 r270
LED8: Top Overlay "*" at 4327.2,3976 h60 r270
LED9: Top Overlay "*" at 3992.91,3976 h60 r270
LED10: Top Overlay "*" at 3340.62,3975.17 h60 r270
LED11: Top Overlay "*" at 2655.98,3975 h60 r270
LED12: Top Overlay "*" at 4151.31,1470.8 h60 r270
X1: Top Overlay "SUPER SEAL 60POS" at 860,3360 h60 r270